# Allegro board BCK-E1_01v1.brd
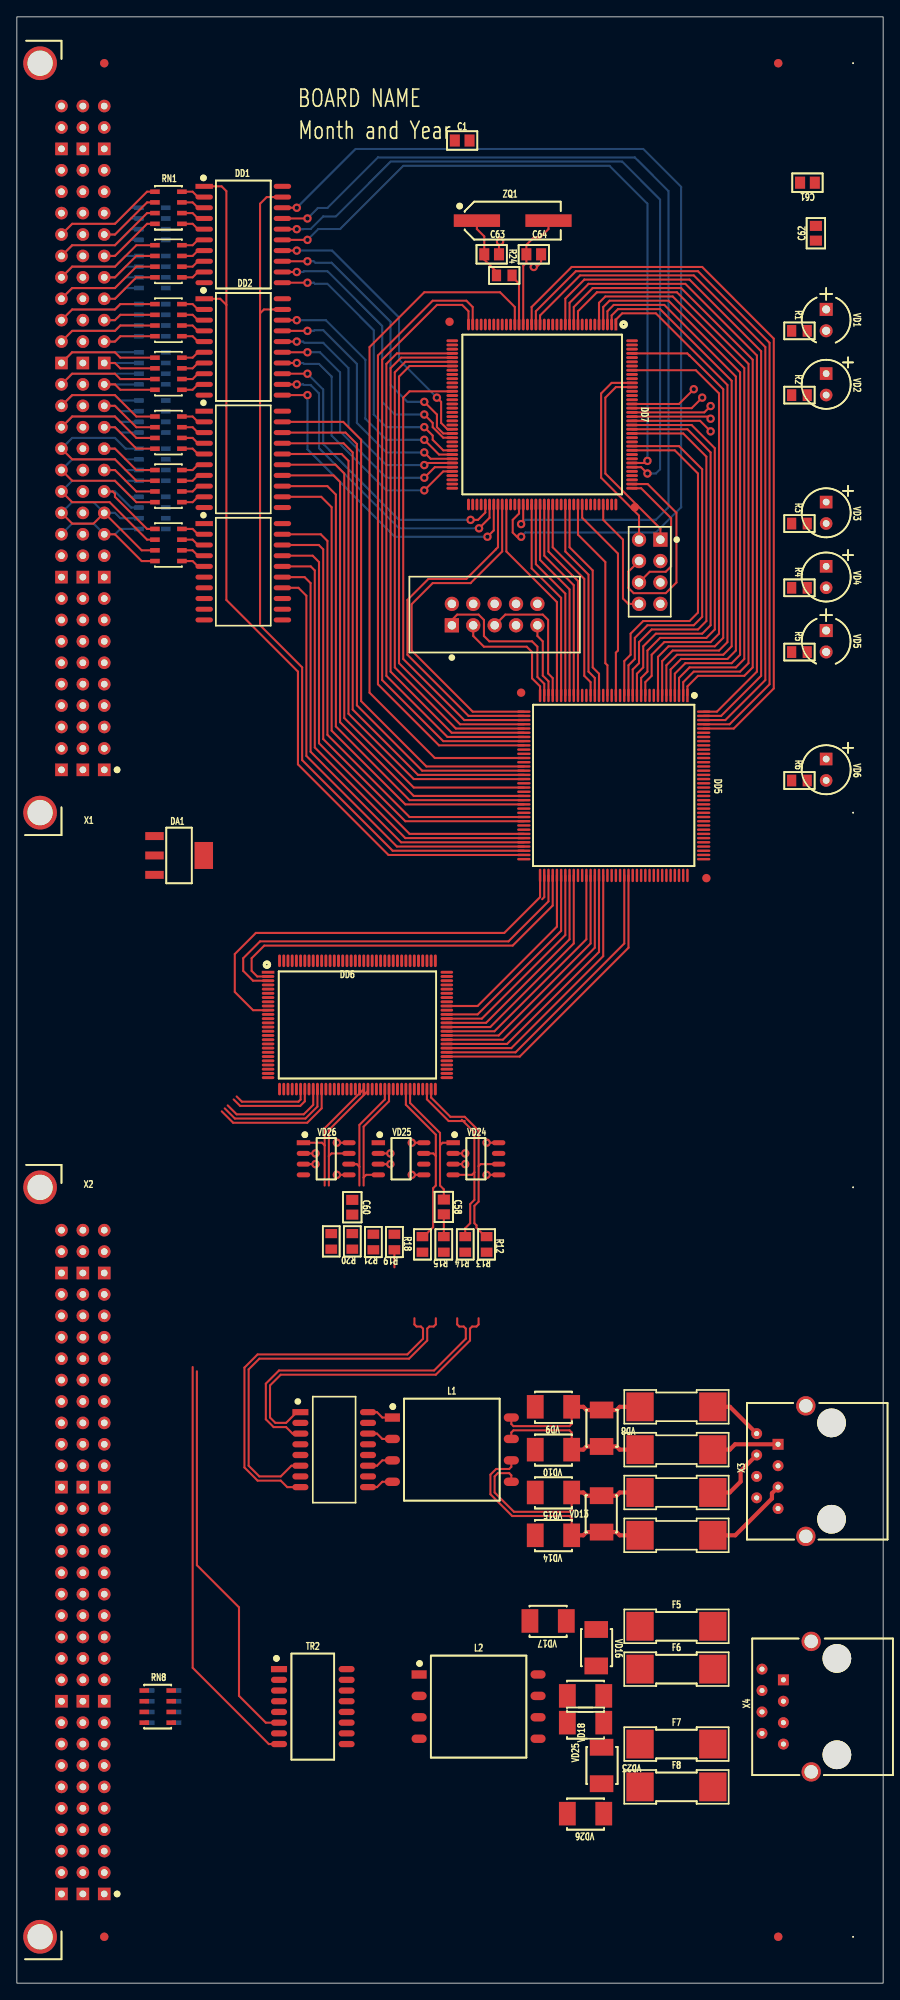
[diagram p0: board, top side]
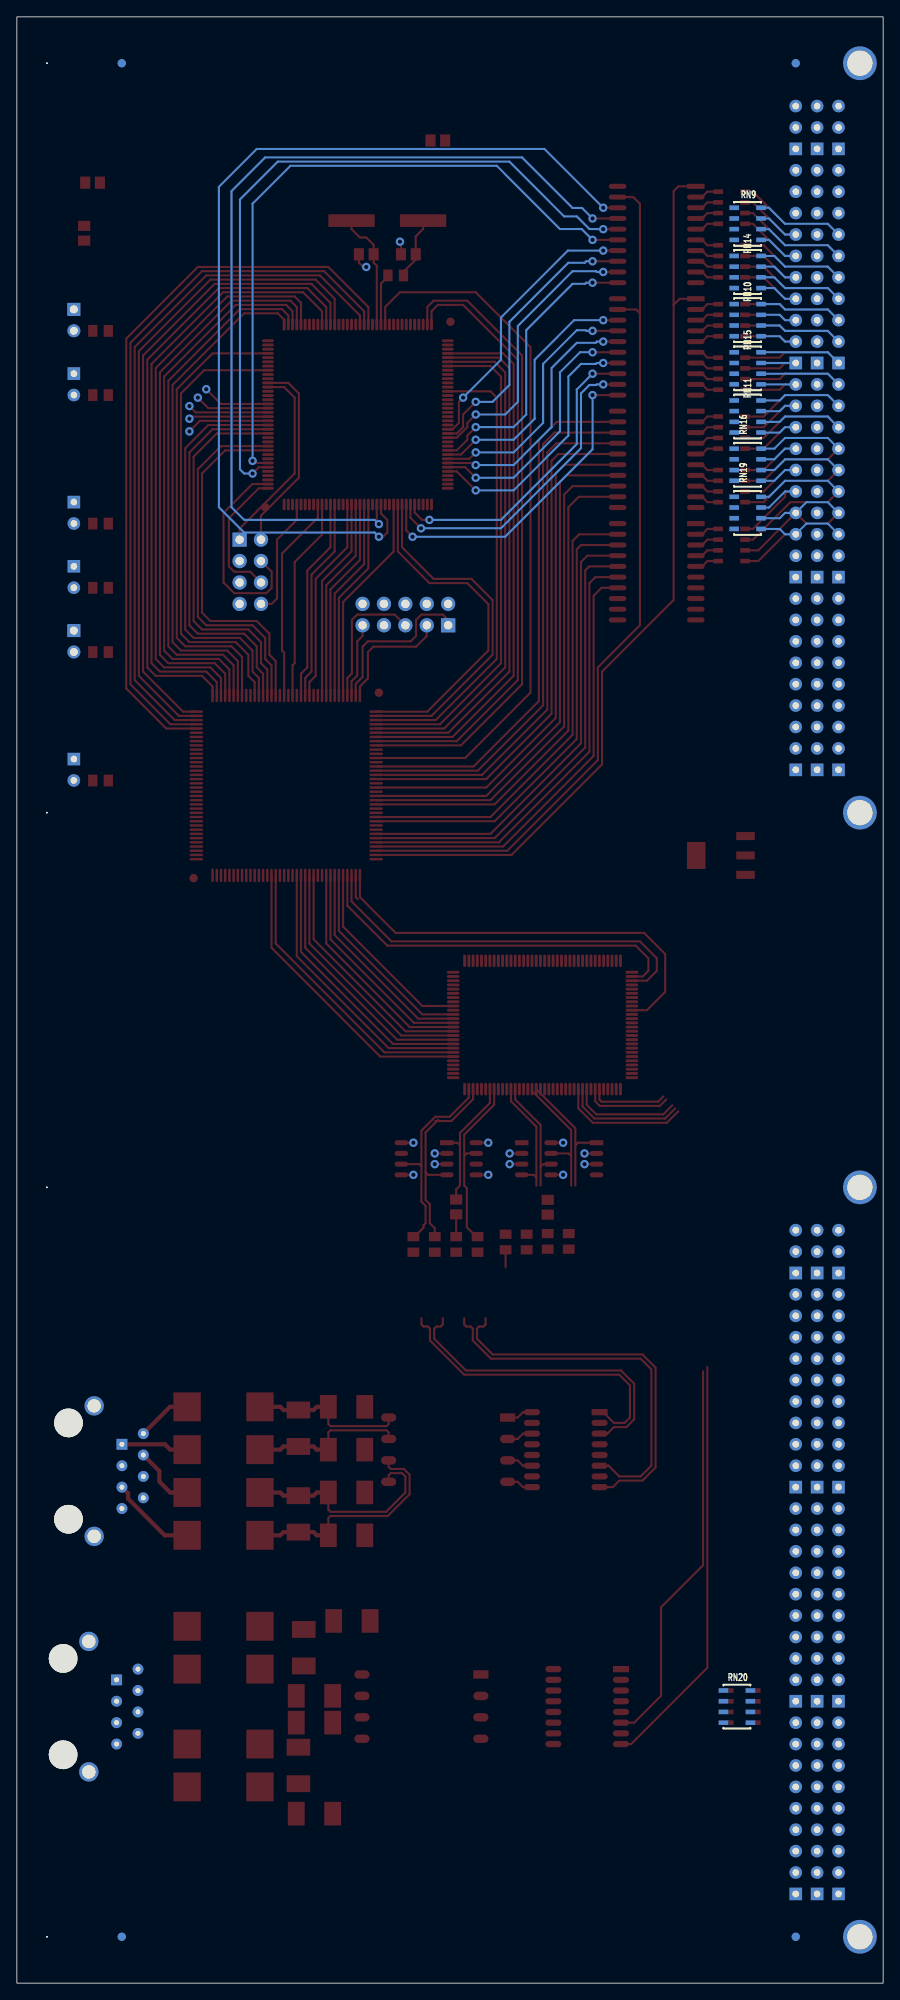
[diagram p1: board, bottom side, seen from below]

Outline 102.87 x 233.25 mm; copper layers: TOP, GND, PWR, BOTTOM. Coordinates in mm from the lower left corner of the outline.
Outline path: rectangle 0,0 102.87,233.25

## Design rules (mm)
net group 1RX1: nets 1RRING_DEF_BLCK1 1RTIP_DEF_BLCK1
net group 1RX2: nets 1RRING_DEF_BLCK2 1RTIP_DEF_BLCK2
net group 1TX1: nets 1TRING_DEF_BLCK1 1TTIP_DEF_BLCK1
net group 1TX2: nets 1TRING_DEF_BLCK2 1TTIP_DEF_BLCK2
net group 2RX1: nets 2RRING_DEF_BLCK1 2RTIP_DEF_BLCK1
net group 2RX2: nets 2RRING_DEF_BLCK2 2RTIP_DEF_BLCK2
net group 2TX1: nets 2TRING_DEF_BLCK1 2TTIP_DEF_BLCK1
net group 2TX2: nets 2TRING_DEF_BLCK2 2TTIP_DEF_BLCK2
net group E_TRLI1_RX: nets TRLI12 TRLI13
net group E_TRLI2_RX: nets TRLI22 TRLI23
net group E_TRLI2_TX: nets TRLI20 TRLI21
net group E_TRLI_TX: nets TRLI10 TRLI11
net group RX1: nets RRING1 RTIP1
net group RX2: nets RRING2 RTIP2
net group TX1: nets TRING1 TTIP1
net group TX2: nets TRING2 TTIP2

## Placement (name value [footprint] x y rotation side)
C1  1uF  [CAPC2012X130N]  52.88 218.58 0 top
C58  1uF  [CAPC2012X130N]  50.7 92.08 270 top
C60  1uF  [CAPC2012X130N]  39.83 92.04 270 top
C61  2.2uF  [CAPC2012X130N]  93.88 213.58 180 top
C62  2.2uF  [CAPC2012X130N]  94.88 207.58 90 top
C63  22pF  [CAPC2012X130N]  56.38 205.08 0 top
C64  22pF  [CAPC2012X130N]  61.38 205.08 0 top
DA1  ADP3339AKCZ-3.3  [SOT230P700X180-4N]  19.27 133.77 0 top
DD1  SN74ACT245DW  [SOIC127P1030X265-20N]  26.89 207.43 0 top
DD2  SN74ACT245DW  [SOIC127P1030X265-20N]  26.89 194.09 0 top
DD3  SN74LVC573ADW  [SOIC127P1030X265-20N]  26.89 180.76 0 top
DD4  SN74LVC573ADW  [SOIC127P1030X265-20N]  26.89 167.43 0 top
DD5  EPM1270T144C4N  [QFP50P2200X2200X160-144N]  70.88 142.08 270 top
DD6  82V2084PF  [QFP50P2200X2000X160-128N]  40.44 113.66 0 top
DD7  STM32F446ZET6  [LQFP50P2200X2200X160-144N]  62.38 186.08 270 top
F1  04611.25ER  [FUS10132X312N]  78.32 68.36 0 top
F2  04611.25ER  [FUS10132X312N]  78.32 63.28 0 top
F3  04611.25ER  [FUS10132X312N]  78.32 53.12 0 top
F4  04611.25ER  [FUS10132X312N]  78.32 58.2 0 top
F5  04611.25ER  [FUS10132X312N]  78.32 42.33 0 top
F6  04611.25ER  [FUS10132X312N]  78.32 37.25 0 top
F7  04611.25ER  [FUS10132X312N]  78.32 28.36 0 top
F8  04611.25ER  [FUS10132X312N]  78.32 23.28 0 top
L1  PE-65857NL  [SOIC254P1509X864-8N]  51.66 63.28 0 top
L2  PE-65857NL  [SOIC254P1509X864-8N]  54.83 32.8 0 top
NOREF  -  [unnamed]  99.3 227.75 0 top
NOREF#2  -  [unnamed]  99.3 138.85 0 top
NOREF#3  -  [unnamed#2]  10.38 5.5 0 top
NOREF#4  -  [unnamed#2]  90.41 5.5 0 top
NOREF#5  -  [unnamed#2]  90.41 227.75 0 top
NOREF#6  -  [unnamed#2]  10.38 227.75 0 top
NOREF#7  -  [unnamed]  99.3 94.4 0 top
NOREF#8  -  [unnamed]  99.3 5.5 0 top
NOREF#9  -  [unnamed#2]  90.41 227.75 180 bottom
NOREF#10  -  [unnamed#2]  10.38 5.5 180 bottom
NOREF#11  -  [unnamed#2]  10.38 227.75 180 bottom
NOREF#12  -  [unnamed#2]  90.41 5.5 180 bottom
R1  2.2k  [RESC2012X40N]  92.93 196 0 top
R2  1k  [RESC2012X40N]  92.93 188.38 0 top
R3  1k  [RESC2012X40N]  92.93 173.14 0 top
R4  1k  [RESC2012X40N]  92.93 165.52 0 top
R5  2.2k  [RESC2012X40N]  92.93 157.9 0 top
R6  1k  [RESC2012X40N]  92.93 142.66 0 top
R12  0  [RESC2012X40N]  55.78 87.63 270 top
R13  0  [RESC2012X40N]  53.24 87.63 270 top
R14  0  [RESC2012X40N]  50.7 87.63 270 top
R15  0  [RESC2012X40N]  48.16 87.63 270 top
R18  0  [RESC2012X40N]  44.83 87.91 270 top
R19  0  [RESC2012X40N]  42.33 87.91 270 top
R20  0  [RESC2012X40N]  37.33 87.99 270 top
R21  0  [RESC2012X40N]  39.83 87.99 270 top
R24  220  [RESC2012X40N]  57.88 202.58 0 top
RN1  100  [RESCAF127P320X508X60-8N]  18 210.61 0 top
RN2  100  [RESCAF127P320X508X60-8N]  18 204.26 0 top
RN3  100  [RESCAF127P320X508X60-8N]  18 197.27 0 top
RN4  100  [RESCAF127P320X508X60-8N]  18 190.92 0 top
RN5  100  [RESCAF127P320X508X60-8N]  18 183.94 0 top
RN6  100  [RESCAF127P320X508X60-8N]  18 177.59 0 top
RN7  100  [RESCAF127P320X508X60-8N]  18 170.6 0 top
RN8  100  [RESCAF127P320X508X60-8N]  16.73 32.8 0 top
RN9  10k  [RESCAF127P320X508X60-8N]  16.09 208.7 180 bottom
RN10  10k  [RESCAF127P320X508X60-8N]  16.09 197.27 180 bottom
RN11  10k  [RESCAF127P320X508X60-8N]  16.09 185.84 180 bottom
RN14  10k  [RESCAF127P320X508X60-8N]  16.09 202.99 180 bottom
RN15  10k  [RESCAF127P320X508X60-8N]  16.09 191.56 180 bottom
RN16  10k  [RESCAF127P320X508X60-8N]  16.09 180.12 180 bottom
RN19  10k  [RESCAF127P320X508X60-8N]  16.09 174.41 180 bottom
RN20  10k  [RESCAF127P320X508X60-8N]  17.37 32.8 180 bottom
TR1  T1094NL  [SOIC127P928X622-16N]  37.69 63.28 0 top
TR2  T1094NL  [SOIC127P928X622-16N]  35.15 32.8 0 top
VD1  FYL-5013PURD1C-60  [LEDRR254W50L580T580H870N]  96.1 197.28 270 top
VD2  L-53GD  [LEDRR254W47L590T590H500N]  96.1 189.66 270 top
VD3  L-53GD  [LEDRR254W47L590T590H500N]  96.1 174.42 270 top
VD4  L-53SYT  [LEDRR254W47L590T590H500N]  96.1 166.8 270 top
VD5  FYL-5013PURD1C-60  [LEDRR254W50L580T580H870N]  96.1 159.18 270 top
VD6  L-53GD  [LEDRR254W47L590T590H500N]  96.1 143.94 270 top
VD8  P0300SCMCLRP  [DIOM5336X265N_PAD200_300]  69.44 65.83 270 top
VD9  P1800SCMCLRP  [DIOM5336X265N_PAD200_300]  63.72 68.36 180 top
VD10  P1800SCMCLRP  [DIOM5336X265N_PAD200_300]  63.72 63.28 180 top
VD13  P0300SCMCLRP  [DIOM5336X265N_PAD200_300]  69.44 55.66 90 top
VD14  P1800SCMCLRP  [DIOM5336X265N_PAD200_300]  63.72 53.12 180 top
VD15  P1800SCMCLRP  [DIOM5336X265N_PAD200_300]  63.72 58.2 180 top
VD16  P0300SCMCLRP  [DIOM5336X265N_PAD200_300]  68.8 39.79 270 top
VD17  P1800SCMCLRP  [DIOM5336X265N_PAD200_300]  63.09 42.96 180 top
VD18  P1800SCMCLRP  [DIOM5336X265N_PAD200_300]  67.53 34.08 180 top
VD21  P0300SCMCLRP  [DIOM5336X265N_PAD200_300]  69.44 25.82 270 top
VD22  P1800SCMCLRP  [DIOM5336X265N_PAD200_300]  67.53 30.9 180 top
VD23  P1800SCMCLRP  [DIOM5336X265N_PAD200_300]  67.53 20.11 180 top
VD24  SRDA05-4BTG  [SOIC127P600X175-8N]  54.51 97.79 0 top
VD25  SRDA05-4BTG  [SOIC127P600X175-8N]  45.62 97.79 0 top
VD26  SRDA05-4BTG  [SOIC127P600X175-8N]  36.73 97.79 0 top
X1  UP  [AUK_DIN_3X32_96MR]  5.3 143.93 90 top
X2  DOWN  [AUK_DIN_3X32_96MR]  5.3 10.58 90 top
X3  1-5406299-1  [TE_1-5406299-1]  90.39 63.92 90 top
X4  1-5406299-1  [TE_1-5406299-1]  91.02 35.98 90 top
X7  IDC-10M  [SHDR0S254P5X2_2025X900X900]  51.66 161.08 0 top
X9  JTAG MCU  [PBD-08]  76.42 171.24 270 top
ZQ1  16.0MHz  [CRYSTAL1140X420N]  58.88 209.08 0 top

## Library data of the parts
C1 C58 C60-C64 = CAPACITOR
DA1 = LM1117
DD1 DD2 = 74LVC245APW_4
DD3 DD4 = SN74ACT573_2
DD5 = EPM1270T144C4N_30
DD6 = 82V2084PF_16
DD7 = STM32F446ZET6_28
F1-F8 = EFUSE
L1 L2 = PE-65857NL
R1-R6 = RESISTOR
R12-R15 R18-R21 R24 = R_0.125W
RN1-RN11 RN14-RN16 RN19 RN20 = Rx4_0.25W_united
TR1 TR2 = T1094NL_0
VD1-VD6 = LED
VD8-VD10 VD13-VD18 VD21-VD23 = THYRISTOR
VD24-VD26 = SRDA05_4
X1 = DIN96_ABC_23
X2 = DIN96_ABC_24
X3 X4 = TJ8P8C_SHIELD_1
X7 = CONN10_1
X9 = CONN8_5
ZQ1 = XTAL

## Footprints (pads in the part's own frame, mm; a bottom-side part is the same pattern mirrored in y, then rotated)
AUK_DIN_3X32_96MR
  rect 1.5x1.5 hole 0.8: A1(0,0) A10(22.86,0) A20(48.26,0) A30(73.66,0) B1(0,-2.54) B10(22.86,-2.54) B20(48.26,-2.54) B30(73.66,-2.54) C1(0,-5.08) C10(22.86,-5.08) C20(48.26,-5.08) C30(73.66,-5.08)
  round 1.5 hole 0.8: A2(2.54,0) A3(5.08,0) A4(7.62,0) A5(10.16,0) A6(12.7,0) A7(15.24,0) A8(17.78,0) A9(20.32,0) A11(25.4,0) A12(27.94,0) A13(30.48,0) A14(33.02,0) A15(35.56,0) A16(38.1,0) A17(40.64,0) A18(43.18,0) A19(45.72,0) A21(50.8,0) A22(53.34,0) A23(55.88,0) A24(58.42,0) A25(60.96,0) A26(63.5,0) A27(66.04,0) A28(68.58,0) A29(71.12,0) A31(76.2,0) A32(78.74,0) B2(2.54,-2.54) B3(5.08,-2.54) B4(7.62,-2.54) B5(10.16,-2.54) B6(12.7,-2.54) B7(15.24,-2.54) B8(17.78,-2.54) B9(20.32,-2.54) B11(25.4,-2.54) B12(27.94,-2.54) B13(30.48,-2.54) B14(33.02,-2.54) B15(35.56,-2.54) B16(38.1,-2.54) B17(40.64,-2.54) B18(43.18,-2.54) B19(45.72,-2.54) B21(50.8,-2.54) B22(53.34,-2.54) B23(55.88,-2.54) B24(58.42,-2.54) B25(60.96,-2.54) B26(63.5,-2.54) B27(66.04,-2.54) B28(68.58,-2.54) B29(71.12,-2.54) B31(76.2,-2.54) B32(78.74,-2.54) C2(2.54,-5.08) C3(5.08,-5.08) C4(7.62,-5.08) C5(10.16,-5.08) C6(12.7,-5.08) C7(15.24,-5.08) C8(17.78,-5.08) C9(20.32,-5.08) C11(25.4,-5.08) C12(27.94,-5.08) C13(30.48,-5.08) C14(33.02,-5.08) C15(35.56,-5.08) C16(38.1,-5.08) C17(40.64,-5.08) C18(43.18,-5.08) C19(45.72,-5.08) C21(50.8,-5.08) C22(53.34,-5.08) C23(55.88,-5.08) C24(58.42,-5.08) C25(60.96,-5.08) C26(63.5,-5.08) C27(66.04,-5.08) C28(68.58,-5.08) C29(71.12,-5.08) C31(76.2,-5.08) C32(78.74,-5.08)
  round 4 hole 3: SHIELD1(-5.08,2.54) SHIELD2(83.82,2.54)
CAPC2012X130N
  rect 1.2x1.45 smd: 1(-0.875,0) 2(0.875,0)
CRYSTAL1140X420N
  rect 5.5x1.5 smd: 1(-4.25,0) 2(4.25,0)
DIOM5336X265N_PAD200_300
  rect 2x2.8 smd: 1(-2.162,0) 2(2.162,0)
FUS10132X312N
  rect 3.25x3.43 smd: 1(-4.325,0) 2(4.325,0)
LEDRR254W47L590T590H500N
  rect 1.5x1.5 hole 0.8: 1(-1.27,0)
  round 1.5 hole 0.8: 2(1.27,0)
LEDRR254W50L580T580H870N
  rect 1.55x1.55 hole 0.95: 1(-1.27,0)
  round 1.55 hole 0.95: 2(1.27,0)
LQFP50P2200X2200X160-144N
  round 1 smd: (-11,-11) (11,11)
  rect 1.4x0.35 smd: 1(-10.675,8.75)
  oval 1.4x0.35 smd: 2(-10.675,8.25) 3(-10.675,7.75) 4(-10.675,7.25) 5(-10.675,6.75) 6(-10.675,6.25) 7(-10.675,5.75) 8(-10.675,5.25) 9(-10.675,4.75) 10(-10.675,4.25) 11(-10.675,3.75) 12(-10.675,3.25) 13(-10.675,2.75) 14(-10.675,2.25) 15(-10.675,1.75) 16(-10.675,1.25) 17(-10.675,0.75) 18(-10.675,0.25) 19(-10.675,-0.25) 20(-10.675,-0.75) 21(-10.675,-1.25) 22(-10.675,-1.75) 23(-10.675,-2.25) 24(-10.675,-2.75) 25(-10.675,-3.25) 26(-10.675,-3.75) 27(-10.675,-4.25) 28(-10.675,-4.75) 29(-10.675,-5.25) 30(-10.675,-5.75) 31(-10.675,-6.25) 32(-10.675,-6.75) 33(-10.675,-7.25) 34(-10.675,-7.75) 35(-10.675,-8.25) 36(-10.675,-8.75) 73(10.675,-8.75) 74(10.675,-8.25) 75(10.675,-7.75) 76(10.675,-7.25) 77(10.675,-6.75) 78(10.675,-6.25) 79(10.675,-5.75) 80(10.675,-5.25) 81(10.675,-4.75) 82(10.675,-4.25) 83(10.675,-3.75) 84(10.675,-3.25) 85(10.675,-2.75) 86(10.675,-2.25) 87(10.675,-1.75) 88(10.675,-1.25) 89(10.675,-0.75) 90(10.675,-0.25) 91(10.675,0.25) 92(10.675,0.75) 93(10.675,1.25) 94(10.675,1.75) 95(10.675,2.25) 96(10.675,2.75) 97(10.675,3.25) 98(10.675,3.75) 99(10.675,4.25) 100(10.675,4.75) 101(10.675,5.25) 102(10.675,5.75) 103(10.675,6.25) 104(10.675,6.75) 105(10.675,7.25) 106(10.675,7.75) 107(10.675,8.25) 108(10.675,8.75)
  oval 0.35x1.4 smd: 37(-8.75,-10.675) 38(-8.25,-10.675) 39(-7.75,-10.675) 40(-7.25,-10.675) 41(-6.75,-10.675) 42(-6.25,-10.675) 43(-5.75,-10.675) 44(-5.25,-10.675) 45(-4.75,-10.675) 46(-4.25,-10.675) 47(-3.75,-10.675) 48(-3.25,-10.675) 49(-2.75,-10.675) 50(-2.25,-10.675) 51(-1.75,-10.675) 52(-1.25,-10.675) 53(-0.75,-10.675) 54(-0.25,-10.675) 55(0.25,-10.675) 56(0.75,-10.675) 57(1.25,-10.675) 58(1.75,-10.675) 59(2.25,-10.675) 60(2.75,-10.675) 61(3.25,-10.675) 62(3.75,-10.675) 63(4.25,-10.675) 64(4.75,-10.675) 65(5.25,-10.675) 66(5.75,-10.675) 67(6.25,-10.675) 68(6.75,-10.675) 69(7.25,-10.675) 70(7.75,-10.675) 71(8.25,-10.675) 72(8.75,-10.675) 109(8.75,10.675) 110(8.25,10.675) 111(7.75,10.675) 112(7.25,10.675) 113(6.75,10.675) 114(6.25,10.675) 115(5.75,10.675) 116(5.25,10.675) 117(4.75,10.675) 118(4.25,10.675) 119(3.75,10.675) 120(3.25,10.675) 121(2.75,10.675) 122(2.25,10.675) 123(1.75,10.675) 124(1.25,10.675) 125(0.75,10.675) 126(0.25,10.675) 127(-0.25,10.675) 128(-0.75,10.675) 129(-1.25,10.675) 130(-1.75,10.675) 131(-2.25,10.675) 132(-2.75,10.675) 133(-3.25,10.675) 134(-3.75,10.675) 135(-4.25,10.675) 136(-4.75,10.675) 137(-5.25,10.675) 138(-5.75,10.675) 139(-6.25,10.675) 140(-6.75,10.675) 141(-7.25,10.675) 142(-7.75,10.675) 143(-8.25,10.675) 144(-8.75,10.675)
PBD-08
  rect 1.7x1.7 hole 1: 1(0,0)
  round 1.7 hole 1: 2(0,-2.54) 3(2.54,0) 4(2.54,-2.54) 5(5.08,0) 6(5.08,-2.54) 7(7.62,0) 8(7.62,-2.54)
QFP50P2200X2000X160-128N
  rect 1.5x0.35 smd: 1(-10.612,6.25)
  oval 1.5x0.35 smd: 2(-10.612,5.75) 3(-10.612,5.25) 4(-10.612,4.75) 5(-10.612,4.25) 6(-10.612,3.75) 7(-10.612,3.25) 8(-10.612,2.75) 9(-10.612,2.25) 10(-10.612,1.75) 11(-10.612,1.25) 12(-10.612,0.75) 13(-10.612,0.25) 14(-10.612,-0.25) 15(-10.612,-0.75) 16(-10.612,-1.25) 17(-10.612,-1.75) 18(-10.612,-2.25) 19(-10.612,-2.75) 20(-10.612,-3.25) 21(-10.612,-3.75) 22(-10.612,-4.25) 23(-10.612,-4.75) 24(-10.612,-5.25) 25(-10.612,-5.75) 26(-10.612,-6.25) 65(10.612,-6.25) 66(10.612,-5.75) 67(10.612,-5.25) 68(10.612,-4.75) 69(10.612,-4.25) 70(10.612,-3.75) 71(10.612,-3.25) 72(10.612,-2.75) 73(10.612,-2.25) 74(10.612,-1.75) 75(10.612,-1.25) 76(10.612,-0.75) 77(10.612,-0.25) 78(10.612,0.25) 79(10.612,0.75) 80(10.612,1.25) 81(10.612,1.75) 82(10.612,2.25) 83(10.612,2.75) 84(10.612,3.25) 85(10.612,3.75) 86(10.612,4.25) 87(10.612,4.75) 88(10.612,5.25) 89(10.612,5.75) 90(10.612,6.25)
  oval 0.35x1.5 smd: 27(-9.25,-7.612) 28(-8.75,-7.612) 29(-8.25,-7.612) 30(-7.75,-7.612) 31(-7.25,-7.612) 32(-6.75,-7.612) 33(-6.25,-7.612) 34(-5.75,-7.612) 35(-5.25,-7.612) 36(-4.75,-7.612) 37(-4.25,-7.612) 38(-3.75,-7.612) 39(-3.25,-7.612) 40(-2.75,-7.612) 41(-2.25,-7.612) 42(-1.75,-7.612) 43(-1.25,-7.612) 44(-0.75,-7.612) 45(-0.25,-7.612) 46(0.25,-7.612) 47(0.75,-7.612) 48(1.25,-7.612) 49(1.75,-7.612) 50(2.25,-7.612) 51(2.75,-7.612) 52(3.25,-7.612) 53(3.75,-7.612) 54(4.25,-7.612) 55(4.75,-7.612) 56(5.25,-7.612) 57(5.75,-7.612) 58(6.25,-7.612) 59(6.75,-7.612) 60(7.25,-7.612) 61(7.75,-7.612) 62(8.25,-7.612) 63(8.75,-7.612) 64(9.25,-7.612) 91(9.25,7.612) 92(8.75,7.612) 93(8.25,7.612) 94(7.75,7.612) 95(7.25,7.612) 96(6.75,7.612) 97(6.25,7.612) 98(5.75,7.612) 99(5.25,7.612) 100(4.75,7.612) 101(4.25,7.612) 102(3.75,7.612) 103(3.25,7.612) 104(2.75,7.612) 105(2.25,7.612) 106(1.75,7.612) 107(1.25,7.612) 108(0.75,7.612) 109(0.25,7.612) 110(-0.25,7.612) 111(-0.75,7.612) 112(-1.25,7.612) 113(-1.75,7.612) 114(-2.25,7.612) 115(-2.75,7.612) 116(-3.25,7.612) 117(-3.75,7.612) 118(-4.25,7.612) 119(-4.75,7.612) 120(-5.25,7.612) 121(-5.75,7.612) 122(-6.25,7.612) 123(-6.75,7.612) 124(-7.25,7.612) 125(-7.75,7.612) 126(-8.25,7.612) 127(-8.75,7.612) 128(-9.25,7.612)
QFP50P2200X2200X160-144N
  round 1 smd: (-11,-11) (11,11)
  rect 1.6x0.3 smd: 1(-10.675,8.75)
  oval 1.6x0.3 smd: 2(-10.675,8.25) 3(-10.675,7.75) 4(-10.675,7.25) 5(-10.675,6.75) 6(-10.675,6.25) 7(-10.675,5.75) 8(-10.675,5.25) 9(-10.675,4.75) 10(-10.675,4.25) 11(-10.675,3.75) 12(-10.675,3.25) 13(-10.675,2.75) 14(-10.675,2.25) 15(-10.675,1.75) 16(-10.675,1.25) 17(-10.675,0.75) 18(-10.675,0.25) 19(-10.675,-0.25) 20(-10.675,-0.75) 21(-10.675,-1.25) 22(-10.675,-1.75) 23(-10.675,-2.25) 24(-10.675,-2.75) 25(-10.675,-3.25) 26(-10.675,-3.75) 27(-10.675,-4.25) 28(-10.675,-4.75) 29(-10.675,-5.25) 30(-10.675,-5.75) 31(-10.675,-6.25) 32(-10.675,-6.75) 33(-10.675,-7.25) 34(-10.675,-7.75) 35(-10.675,-8.25) 36(-10.675,-8.75) 73(10.675,-8.75) 74(10.675,-8.25) 75(10.675,-7.75) 76(10.675,-7.25) 77(10.675,-6.75) 78(10.675,-6.25) 79(10.675,-5.75) 80(10.675,-5.25) 81(10.675,-4.75) 82(10.675,-4.25) 83(10.675,-3.75) 84(10.675,-3.25) 85(10.675,-2.75) 86(10.675,-2.25) 87(10.675,-1.75) 88(10.675,-1.25) 89(10.675,-0.75) 90(10.675,-0.25) 91(10.675,0.25) 92(10.675,0.75) 93(10.675,1.25) 94(10.675,1.75) 95(10.675,2.25) 96(10.675,2.75) 97(10.675,3.25) 98(10.675,3.75) 99(10.675,4.25) 100(10.675,4.75) 101(10.675,5.25) 102(10.675,5.75) 103(10.675,6.25) 104(10.675,6.75) 105(10.675,7.25) 106(10.675,7.75) 107(10.675,8.25) 108(10.675,8.75)
  oval 0.3x1.6 smd: 37(-8.75,-10.675) 38(-8.25,-10.675) 39(-7.75,-10.675) 40(-7.25,-10.675) 41(-6.75,-10.675) 42(-6.25,-10.675) 43(-5.75,-10.675) 44(-5.25,-10.675) 45(-4.75,-10.675) 46(-4.25,-10.675) 47(-3.75,-10.675) 48(-3.25,-10.675) 49(-2.75,-10.675) 50(-2.25,-10.675) 51(-1.75,-10.675) 52(-1.25,-10.675) 53(-0.75,-10.675) 54(-0.25,-10.675) 55(0.25,-10.675) 56(0.75,-10.675) 57(1.25,-10.675) 58(1.75,-10.675) 59(2.25,-10.675) 60(2.75,-10.675) 61(3.25,-10.675) 62(3.75,-10.675) 63(4.25,-10.675) 64(4.75,-10.675) 65(5.25,-10.675) 66(5.75,-10.675) 67(6.25,-10.675) 68(6.75,-10.675) 69(7.25,-10.675) 70(7.75,-10.675) 71(8.25,-10.675) 72(8.75,-10.675) 109(8.75,10.675) 110(8.25,10.675) 111(7.75,10.675) 112(7.25,10.675) 113(6.75,10.675) 114(6.25,10.675) 115(5.75,10.675) 116(5.25,10.675) 117(4.75,10.675) 118(4.25,10.675) 119(3.75,10.675) 120(3.25,10.675) 121(2.75,10.675) 122(2.25,10.675) 123(1.75,10.675) 124(1.25,10.675) 125(0.75,10.675) 126(0.25,10.675) 127(-0.25,10.675) 128(-0.75,10.675) 129(-1.25,10.675) 130(-1.75,10.675) 131(-2.25,10.675) 132(-2.75,10.675) 133(-3.25,10.675) 134(-3.75,10.675) 135(-4.25,10.675) 136(-4.75,10.675) 137(-5.25,10.675) 138(-5.75,10.675) 139(-6.25,10.675) 140(-6.75,10.675) 141(-7.25,10.675) 142(-7.75,10.675) 143(-8.25,10.675) 144(-8.75,10.675)
RESC2012X40N
  rect 1.1x1.4 smd: 1(-0.925,0) 2(0.925,0)
RESCAF127P320X508X60-8N
  rect 1.15x0.55 smd: 1(-1.6,1.905) 2(-1.6,0.635) 3(-1.6,-0.635) 4(-1.6,-1.905) 5(1.6,-1.905) 6(1.6,-0.635) 7(1.6,0.635) 8(1.6,1.905)
SHDR0S254P5X2_2025X900X900
  rect 1.7x1.7 hole 1: 1(0,0)
  round 1.7 hole 1: 2(0,2.54) 3(2.54,0) 4(2.54,2.54) 5(5.08,0) 6(5.08,2.54) 7(7.62,0) 8(7.62,2.54) 9(10.16,0) 10(10.16,2.54)
SOIC127P600X175-8N
  rect 1.6x0.6 smd: 1(-2.7,1.905)
  oval 1.6x0.6 smd: 2(-2.7,0.635) 3(-2.7,-0.635) 4(-2.7,-1.905) 5(2.7,-1.905) 6(2.7,-0.635) 7(2.7,0.635) 8(2.7,1.905)
SOIC127P928X622-16N
  rect 1.91x0.74 smd: 1(-4.015,4.445)
  oval 1.91x0.74 smd: 2(-4.015,3.175) 3(-4.015,1.905) 4(-4.015,0.635) 5(-4.015,-0.635) 6(-4.015,-1.905) 7(-4.015,-3.175) 8(-4.015,-4.445) 9(4.015,-4.445) 10(4.015,-3.175) 11(4.015,-1.905) 12(4.015,-0.635) 13(4.015,0.635) 14(4.015,1.905) 15(4.015,3.175) 16(4.015,4.445)
SOIC127P1030X265-20N
  rect 2.075x0.6 smd: 1(-4.645,5.715)
  oval 2.075x0.6 smd: 2(-4.645,4.445) 3(-4.645,3.175) 4(-4.645,1.905) 5(-4.645,0.635) 6(-4.645,-0.635) 7(-4.645,-1.905) 8(-4.645,-3.175) 9(-4.645,-4.445) 10(-4.645,-5.715) 11(4.645,-5.715) 12(4.645,-4.445) 13(4.645,-3.175) 14(4.645,-1.905) 15(4.645,-0.635) 16(4.645,0.635) 17(4.645,1.905) 18(4.645,3.175) 19(4.645,4.445) 20(4.645,5.715)
SOIC254P1509X864-8N
  rect 1.8x1 smd: 1(-7.062,3.81)
  oval 1.8x1 smd: 2(-7.062,1.27) 3(-7.062,-1.27) 4(-7.062,-3.81) 5(7.062,-3.81) 6(7.062,-1.27) 7(7.062,1.27) 8(7.062,3.81)
SOT230P700X180-4N
  rect 2.2x0.95 smd: 1(-2.925,2.3) 2(-2.925,0) 3(-2.925,-2.3)
  rect 2.2x3.2 smd: 4(2.925,0)
TE_1-5406299-1
  round 3.4 hole 3.4: (-8.89,-6.35) (2.54,-6.35)
  rect 1.3x1.3 hole 0.6: 1(0,0)
  round 1.3 hole 0.6: 2(1.27,2.54) 3(-2.54,0) 4(-1.27,2.54) 5(-5.08,0) 6(-3.81,2.54) 7(-7.62,0) 8(-6.35,2.54)
  round 2.3 hole 1.6: SHIELD1(-10.92,-3.3) SHIELD2(4.56,-3.3)
unnamed
  round 0.2 hole 2.7 unplated: (0,0)
unnamed#2
  round 1 smd: (0,0)

## Nets
GND: C1.2 C61.2 C62.2 C63.2 C64.2 DA1.1(GND) DD1.10(GND) DD2.10(GND) DD3.1(\\O\E) DD3.10(GND) DD4.1(\\O\E) DD4.10(GND) DD5.10(GNDIO#10) DD5.17(GNDINT#17) DD5.26(GNDIO#26) DD5.47(GNDIO#47) DD5.54(GNDINT#54) DD5.60(DEV_OE) DD5.65(GNDIO#65) DD5.83(GNDIO#83) DD5.89(GCLK2) DD5.91(GCLK3) DD5.92(GNDINT#92) DD5.99(GNDIO#99) DD5.115(GNDIO#115) DD5.128(GNDINT#128) DD5.135(GNDIO#135) DD6.7(IC_1) DD6.8(P/\S\) DD6.11(GNDD#11) DD6.12(GNDIO#12) DD6.23(GNDIO#23) DD6.39(IC_2) DD6.40(MCLKS) DD6.41(GNDA#41) DD6.49(GNDT3#49) DD6.50(GNDT3#50) DD6.51(GNDR3) DD6.59(GNDT4#59) DD6.60(GNDT4#60) DD6.61(GNDR4) DD6.69(GNDIO#69) DD6.83(GNDIO#83) DD6.84(GNDD#84) DD6.98(GNDIO#98) DD6.105(GNDT1#105) DD6.106(GNDT1#106) DD6.107(GNDR1) DD6.115(GNDT2#115) DD6.116(GNDT2#116) DD6.117(GNDR2) DD6.122(GNDA#122) DD6.123(\T\R\S\T\) DD7.16(VSS#16) DD7.31(VSSA) DD7.38(VSS#38) DD7.51(VSS#51) DD7.61(VSS#61) DD7.83(VSS#83) DD7.94(VSS#94) DD7.107(VSS#107) DD7.120(VSS#120) DD7.130(VSS#130) VD9.2(ANODE) VD10.2(ANODE) VD14.2(ANODE) VD15.2(ANODE) VD17.2(ANODE) VD18.2(ANODE) VD22.2(ANODE) VD23.2(ANODE) VD24.5(REF2) VD24.8(REF2_1) VD25.5(REF2) VD25.8(REF2_1) VD26.5(REF2) VD26.8(REF2_1) X1.A3(GND) X1.B3(GND#B3) X1.B4(GND#B4) X1.B5(GND#B5) X1.B6(GND#B6) X1.B7(GND#B7) X1.B8(GND#B8) X1.B9(GND#B9) X1.B10(GND#B10) X1.B11(GND#B11) X1.B12(GND#B12) X1.B13(GND#B13) X1.B14(GND#B14) X1.B15(GND#B15) X1.B16(GND#B16) X1.B17(GND#B17) X1.B18(GND#B18) X1.B19(GND#B19) X1.B20(GND#B20) X1.B21(GND#B21) X1.B22(GND#B22) X1.B23(GND#B23) X1.B24(GND#B24) X1.B25(GND#B25) X1.B26(GND#B26) X1.B27(GND#B27) X1.C3(GND) X2.A14(GND) X2.B1(GND#B1) X2.B2(GND#B2) X2.B3(GND#B3) X2.B4(GND#B4) X2.B6(GND#B6) X2.B7(GND#B7) X2.B8(GND#B8) X2.B9(GND#B9) X2.B10(GND#B10) X2.B11(GND#B11) X2.B13(GND#B13) X2.B14(GND#B14) X2.B15(GND#B15) X2.B16(GND#B16) X2.B17(GND#B17) X2.B18(GND#B18) X2.B19(GND#B19) X2.B20(GND#B20) X2.B21(GND#B21) X2.B22(GND#B22) X2.B23(GND#B23) X2.B24(GND#B24) X2.B25(GND#B25) X2.B26(GND#B26) X2.B27(GND#B27) X2.B28(GND#B28) X2.B29(GND#B29) X2.B30(GND#B30) X2.B31(GND#B31) X2.B32(GND#B32) X2.C14(GND) X7.2(GND#2) X7.10(GND#10) X9.5(GND)
1RRING_DEF_BLCK1: R13.2 TR1.3
1RRING_DEF_BLCK2: R19.2 TR2.3
1RTIP_DEF_BLCK1: R12.2 TR1.1
1RTIP_DEF_BLCK2: R18.2 TR2.1
1TRING_DEF_BLCK1: R15.2 TR1.8
1TRING_DEF_BLCK2: R21.2 TR2.8
1TTIP_DEF_BLCK1: R14.2 TR1.6
1TTIP_DEF_BLCK2: R20.2 TR2.6
2RRING_DEF_BLCK1: F2.1 L1.7 VD8.2(ANODE) VD10.1(CATHODE)
2RRING_DEF_BLCK2: F6.1 L2.7 VD16.2(ANODE) VD18.1(CATHODE)
2RTIP_DEF_BLCK1: F1.1 L1.8 VD8.1(CATHODE) VD9.1(CATHODE)
2RTIP_DEF_BLCK2: F5.1 L2.8 VD16.1(CATHODE) VD17.1(CATHODE)
2TRING_DEF_BLCK1: F4.1 L1.5 VD13.2(ANODE) VD15.1(CATHODE)
2TRING_DEF_BLCK2: F8.1 L2.5 VD21.2(ANODE) VD23.1(CATHODE)
2TTIP_DEF_BLCK1: F3.1 L1.6 VD13.1(CATHODE) VD14.1(CATHODE)
2TTIP_DEF_BLCK2: F7.1 L2.6 VD21.1(CATHODE) VD22.1(CATHODE)
#CS0: RN6.2 RN16.8 X1.A16(#CS0)
#CS1: RN6.1 RN16.7 X1.C16(#CS1)
#CS2: RN6.4 RN16.6 X1.A15(#CS2)
#CS3: RN6.3 RN16.5 X1.C15(#CS3)
#DEV_CLR: DD5.61(DEV_CLRN)
#OE: DD1.19(\\O\E) DD2.19(\\O\E) DD5.70(O\E\)
#RD: RN7.2 RN19.8 X1.A14(#RD)
#RES: RN7.4 RN19.5 X1.A12(#RES) X1.C12(#RES)
#TCS0: DD3.14(6Q) DD5.57(#CS0)
#TCS1: DD3.15(5Q) DD5.55(#CS1)
#TCS2: DD3.12(8Q) DD5.59(#CS2)
#TCS3: DD3.13(7Q) DD5.58(#CS3)
#TRD: DD4.18(2Q) DD5.63(#RD)
#TRES: DD4.16(4Q) DD5.67(#RES)
#TWR: DD4.19(1Q) DD5.62(#WR)
#WR: RN7.1 RN19.7 X1.C14(#WR)
+3.3B: DA1.2(VO#2) DA1.4(VO#4) DD3.11(LE) DD3.20(VCC) DD4.11(LE) DD4.20(VCC) DD6.9(VDDD#9) DD6.13(VDDIO#13) DD6.22(VDDIO#22) DD6.45(VDDT3#45) DD6.46(VDDT3#46) DD6.54(VDDR3) DD6.55(VDDT4#55) DD6.56(VDDT4#56) DD6.64(VDDR4) DD6.68(VDDIO#68) DD6.81(VDDIO#81) DD6.85(VDDD#85) DD6.99(VDDIO#99) DD6.101(VDDT1#101) DD6.102(VDDT1#102) DD6.110(VDDR1) DD6.111(VDDT2#111) DD6.112(VDDT2#112) DD6.120(VDDR2) DD7.6(VBAT) DD7.17(VDD#17) DD7.30(VDD#30) DD7.39(VDD#39) DD7.52(VDD#52) DD7.62(VDD#62) DD7.72(VDD#72) DD7.84(VDD#84) DD7.95(VDDUSB) DD7.108(VDD#108) DD7.121(VDD#121) DD7.131(VDD#131) DD7.143(PDR_ON) DD7.144(VDD#144) VD1.1(ANODE) VD2.1(ANODE) VD3.1(ANODE) VD4.1(ANODE) VD5.1(ANODE) VD6.1(ANODE) VD24.2(REF1) VD24.3(REF1_1) VD25.2(REF1) VD25.3(REF1_1) VD26.2(REF1) VD26.3(REF1_1) X9.3(3V3)
+3.3B_CPLD: DD5.9(VCCIO1#9) DD5.19(VCCINT#19) DD5.25(VCCIO1#25) DD5.46(VCCIO4#46) DD5.56(VCCINT#56) DD5.64(VCCIO4#64) DD5.82(VCCIO3#82) DD5.90(VCCINT#90) DD5.100(VCCIO3#100) DD5.116(VCCIO2#116) DD5.126(VCCINT#126) DD5.136(VCCIO2#136) X7.4(VDD)
+3.3BA_E1: DD6.44(VDDA#44) DD6.121(VDDA#121)
+3.3BA_MCU: DD7.32(VREF+) DD7.33(VDDA)
+5B: C1.1 DA1.3(VI) DD1.20(VCC) DD2.20(VCC) RN9.1 RN9.2 RN9.3 RN9.4 RN10.1 RN10.2 RN10.3 RN10.4 RN11.1 RN11.2 RN11.3 RN11.4 RN14.1 RN14.2 RN14.3 RN14.4 RN15.1 RN15.2 RN15.3 RN15.4 RN16.1 RN16.2 RN16.3 RN16.4 RN19.1 RN19.2 RN19.3 RN19.4 RN20.1 RN20.2 X1.A1(+5B#A1) X1.A2(+5B#A2) X1.B1(+5B#B1) X1.B2(+5B#B2) X1.C1(+5B#C1) X1.C2(+5B#C2)
A0: RN5.1 RN11.8 X1.A18(A0)
A1: RN5.2 RN11.7 X1.C18(A1)
A2: RN5.3 RN11.6 X1.A17(A2)
A3: RN5.4 RN11.5 X1.C17(A3)
ADR0: RN8.1 RN20.8 X2.A10(ADR0)
ADR1: RN8.2 RN20.7 X2.C10(ADR1)
BL: RN7.3 RN19.6 X1.A13(BL) X1.C13(BL)
BUSR3: X1.A8(BUSR3) X1.C8(BUSR3)
CI0: DD5.103(C\S\) DD6.32(\C\S\)
CI1: DD5.102(SCLK) DD6.33(SCLK)
CI2: DD5.104(SDI) DD6.35(SDI/R/\W\/\W\R\)
CI3: DD5.105(SDO) DD6.36(SDO)
CI4: DD5.107(I\N\T\) DD6.37(\I\N\T\)
CI5: DD5.98(R\S\T\) DD6.38(\R\S\T\)
CI6: DD5.106(THZ) DD6.4(THZ)
CI7: DD5.74(SCLKE) DD6.5(SCLKE)
D0: RN1.1 RN9.8 X1.A26(D0)
D1: RN1.2 RN9.7 X1.C26(D1)
D2: RN1.3 RN9.6 X1.A25(D2)
D3: RN1.4 RN9.5 X1.C25(D3)
D4: RN2.1 RN14.8 X1.A24(D4)
D5: RN2.2 RN14.7 X1.C24(D5)
D6: RN2.3 RN14.6 X1.A23(D6)
D7: RN2.4 RN14.5 X1.C23(D7)
D8: RN3.1 RN10.8 X1.A22(D8)
D9: RN3.2 RN10.7 X1.C22(D9)
D10: RN3.3 RN10.6 X1.A21(D10)
D11: RN3.4 RN10.5 X1.C21(D11)
D12: RN4.1 RN15.8 X1.A20(D12)
D13: RN4.2 RN15.7 X1.C20(D13)
D14: RN4.3 RN15.6 X1.A19(D14)
D15: RN4.4 RN15.5 X1.C19(D15)
DIR: DD1.1(DIR) DD2.1(DIR) DD5.71(DIR)
DOP0: DD5.31(DOP0) DD7.88(PG3)
DOP1: DD5.30(DOP1) DD7.89(PG4)
DOP2: DD5.29(DOP2) DD7.90(PG5)
DOP3: DD5.28(DOP3) DD7.91(PG6)
DOP4: DD5.27(DOP4) DD7.92(PG7)
DOP5: DD5.24(DOP5) DD7.93(PG8)
DOP6: DD5.23(DOP6) DD7.96(PC6)
DOP7: DD5.22(DOP7) DD7.97(PC7)
FMC_A0: DD5.2(FMC_A0) DD7.10(PF00/FMC_A0)
FMC_A1: DD5.1(FMC_A1) DD7.11(PF01/FMC_A1)
FMC_A2: DD5.144(FMC_A2) DD7.12(PF02/FMC_A2)
FMC_A3: DD5.143(FMC_A3) DD7.13(PF03/FMC_A3)
FMC_O0: DD5.13(FMC_NE1) DD7.123(PD07/FMC_NE1)
FMC_O1: DD5.11(FMC_NL) DD7.137(PB07/FMC_NL)
FMC_O2: DD5.16(FMC_NOE) DD7.118(PD04/FMC_NOE)
FMC_O3: DD5.14(FMC_NWAIT) DD7.122(PD06/FMC_NWAIT)
FMC_O4: DD5.15(FMC_NWE) DD7.119(PD05/FMC_NWE)
JTCK: DD7.109(PA14/JTCK) X9.6(JTCK)
JTDI: DD7.110(PA15/JTDI) X9.4(JTDI)
JTDO: DD7.133(PB03/JTDO) X9.1(JTDO)
JTMS: DD7.105(PA13/JTMS) X9.8(JTMS)
LED0: DD7.26(PC0) R1.1
LED1: DD7.27(PC1) R2.1
LED2: DD7.28(PC2) R3.1
LED3: DD7.87(PG2) R4.1
LED4: DD7.57(PG1) R5.1
LED5: DD7.56(PG0) R6.1
MCLK: DD5.73(MCLK) DD6.10(MCLK)
N407814_DEF_BLCK1: L1.1 TR1.16(P16)
N407814_DEF_BLCK2: L2.1 TR2.16(P16)
N407826_DEF_BLCK1: L1.2 TR1.14(P14)
N407826_DEF_BLCK2: L2.2 TR2.14(P14)
N407846_DEF_BLCK1: L1.4 TR1.9(P9)
N407846_DEF_BLCK2: L2.4 TR2.9(P9)
N586978_DEF_BLCK1: L1.3 TR1.11(P11)
N586978_DEF_BLCK2: L2.3 TR2.11(P11)
N601644_DEF_BLCK1: C58.2 R14.1
N601644_DEF_BLCK2: C60.2 R20.1
NJTRST: DD7.134(PB4/NJTRST) X9.2(NJTRST)
RRING1: F2.2 X3.1(RRING)
RRING2: F6.2 X4.1(RRING)
RTIP1: F1.2 X3.2(RTIP)
RTIP2: F5.2 X4.2(RTIP)
SAI1A0: DD5.5(FS1) DD7.3(PE04/SAI1_FS_A)
SAI1A1: DD5.7(MCLK1) DD7.1(PE02/SAI1_MCLK_A)
SAI1A2: DD5.4(SCK1) DD7.4(PE05/SAI1_SCK_A)
SAI1A3: DD5.3(SD1) DD7.5(PE06/SAI1_SD_A)
SAI1B0: DD5.140(FS2) DD7.21(PF09/SAI1_FS_B)
SAI1B1: DD5.142(MCLK2) DD7.19(PF07/SAI1_MCLK_B)
SAI1B2: DD5.141(SCK2) DD7.20(PF08/SA1_SCK_B)
SAI1B3: DD5.6(SD2) DD7.2(PE03/SAI1_SD_B)
SAI2A0: DD5.37(FS3) DD7.81(PD12/SAI2_FS_A)
SAI2A1: DD5.8(MCLK3) DD7.141(PE00/SAI2_MCLK_A)
SAI2A2: DD5.32(SCK3) DD7.82(PD13/SAI2_SCK_A)
SAI2A3: DD5.38(SD3) DD7.80(PD11/SAI2_SD_A)
SAI2B0: DD5.12(FS4) DD7.124(PG9/SAI2_FS_B)
SAI2B1: DD5.45(MCLK4) DD7.35(PA01/SAI2_MCLK_B)
SAI2B2: DD5.44(SCK4) DD7.36(PA02/SAI2_SCK_B)
SAI2B3: DD5.39(SD4) DD7.49(PF11/SAI2_SD_B)
SPI0: DD5.40(MOSI) DD7.43(PA07/SPI1_MOSI)
SPI1: DD5.41(MISO) DD7.42(PA06/SPI1_MISO)
SPI2: DD5.42(SCK) DD7.41(PA05/SPI1_SCK)
SPI3: DD5.43(NSS) DD7.40(PA04/SPI1_NSS)
TA0: DD3.19(1Q) DD5.50(A0)
TA1: DD3.18(2Q) DD5.51(A1)
TA2: DD3.17(3Q) DD5.52(A2)
TA3: DD3.16(4Q) DD5.53(A3)
TADR0: DD4.15(5Q) DD5.68(ADR0)
TADR1: DD4.14(6Q) DD5.69(ADR1)
TBL: DD4.17(3Q) DD5.66(BL)
TBUSR3: DD5.72(BUSR)
TCK: DD5.35(TCK) X7.1(TCK)
TD0: DD1.18(B1) DD7.85(PD14/FMC_D0)
TD1: DD1.17(B2) DD7.86(PD15/FMC_D1)
TD2: DD1.16(B3) DD7.114(PD00/FMC_D2)
TD3: DD1.15(B4) DD7.115(PD01/FMC_D3)
TD4: DD1.14(B5) DD7.58(PE07/FMC_D4)
TD5: DD1.13(B6) DD7.59(PE08/FMC_D5)
TD6: DD1.12(B7) DD7.60(PE09/FMC_D6)
TD7: DD1.11(B8) DD7.63(PE10/FMC_D7)
TD8: DD2.18(B1) DD7.64(PE11/FMC_D8)
TD9: DD2.17(B2) DD7.65(PE12/FMC_D9)
TD10: DD2.16(B3) DD7.66(PE13/FMC_D10)
TD11: DD2.15(B4) DD7.67(PE14/FMC_D11)
TD12: DD2.14(B5) DD7.68(PE15/FMC_D12)
TD13: DD2.13(B6) DD7.77(PD08/FMC_D13)
TD14: DD2.12(B7) DD7.78(PD09/FMC_D14)
TD15: DD2.11(B8) DD7.79(PD10/FMC_D15)
TDI: DD5.34(TDI) X7.9(TDI)
TDO: DD5.36(TDO) X7.3(TDO)
TMS: DD5.33(TMS) X7.5(TMS)
TP0: DD7.29(PC3)
TP1: DD7.104(PA12)
TP2: DD7.125(PG10)
TP3: DD7.126(PG11)
TP4: DD7.127(PG12)
TP5: DD7.128(PG13)
TP6: DD7.129(PG14)
TP7: DD7.132(PG15)
TRDDI10: DD5.75(LOS1) DD6.3(LOS4)
TRDDI11: DD5.88(RCLK1) DD6.72(RCLK4)
TRDDI12: DD5.93(RD/RDP1) DD6.71(RD4/RDP4)
TRDDI13: DD5.94(CV/RDN1) DD6.70(CV4/RDN4)
TRDDI14: DD5.85(TCLK1) DD6.75(TCLK4)
TRDDI15: DD5.86(TD/TDP1) DD6.74(TD4/TDP4)
TRDDI16: DD5.87(TDN1) DD6.73(TDN4)
TRDDI20: DD5.76(LOS2) DD6.2(LOS3)
TRDDI21: DD5.80(RCLK2) DD6.78(RCLK3)
TRDDI22: DD5.81(RD/RDP2) DD6.77(RD3/RDP3)
TRDDI23: DD5.84(CV/RDN2) DD6.76(CV3/RDN3)
TRDDI24: DD5.77(TCLK2) DD6.82(TCLK3)
TRDDI25: DD5.78(TD/TDP2) DD6.80(TD3/TDP3)
TRDDI26: DD5.79(TDN2) DD6.79(TDN3)
TRING1: F4.2 X3.4(TRING)
TRING2: F8.2 X4.4(TRING)
TRLI10: C58.1 DD6.58(TTIP4) VD24.1(IO1)
TRLI11: DD6.57(TRING4) R15.1 VD25.7(IO4)
TRLI12: DD6.63(RTIP4) R12.1 VD24.6(IO3)
TRLI13: DD6.62(RRING4) R13.1 VD24.4(IO2)
TRLI20: C60.1 DD6.48(TTIP3) VD26.7(IO4)
TRLI21: DD6.47(TRING3) R21.1 VD26.1(IO1)
TRLI22: DD6.53(RTIP3) R18.1 VD25.4(IO2)
TRLI23: DD6.52(RRING3) R19.1 VD26.6(IO3)
TTIP1: F3.2 X3.5(TTIP)
TTIP2: F7.2 X4.5(TTIP)
N303587: DD1.6(A5) RN2.8
N303599: DD1.7(A6) RN2.7
N303611: DD1.8(A7) RN2.6
N303626: DD1.9(A8) RN2.5
N310570: DD2.6(A5) RN4.8
N310582: DD2.7(A6) RN4.7
N310594: DD2.8(A7) RN4.6
N310606: DD2.9(A8) RN4.5
N317351: DD3.6(5D) RN6.8
N317366: DD3.7(6D) RN6.7
N317381: DD3.8(7D) RN6.6
N317913: DD3.9(8D) RN6.5
N319864: DD4.6(5D) RN8.8
N319876: DD4.7(6D) RN8.7
N322174: DD3.5(4D) RN5.5
N322189: DD3.4(3D) RN5.6
N322204: DD3.3(2D) RN5.7
N322218: DD3.2(1D) RN5.8
N322539: DD4.5(4D) RN7.5
N322554: DD4.4(3D) RN7.6
N322569: DD4.3(2D) RN7.7
N322584: DD4.2(1D) RN7.8
N326209: DD2.5(A4) RN3.5
N326224: DD2.4(A3) RN3.6
N326239: DD2.3(A2) RN3.7
N326254: DD2.2(A1) RN3.8
N326670: DD1.5(A4) RN1.5
N326685: DD1.4(A3) RN1.6
N326700: DD1.3(A2) RN1.7
N326715: DD1.2(A1) RN1.8
N419952: DD7.24(PH1/OSC_OUT) R24.2
N419956: C63.1 R24.1 ZQ1.1
N419974: C64.1 DD7.23(PH0/OSC_IN) ZQ1.2
N420535: C62.1 DD7.71(VCAP_1)
N420542: C61.1 DD7.106(VCAP_2)
N423650: DD7.138(BOOT0)
N444708: R1.2 VD1.2(CATHODE)
N444712: R2.2 VD2.2(CATHODE)
N444716: R3.2 VD3.2(CATHODE)
N444720: R4.2 VD4.2(CATHODE)
N444724: R5.2 VD5.2(CATHODE)
N444728: R6.2 VD6.2(CATHODE)
N526269: DD5.18(GCLK0) DD7.100(PA08/RCC_MCO_1)
N526273: DD5.20(GCLK1) DD7.99(PC09/RCC_MCO_2)
N570726: DD5.109(TP0)
N570730: DD5.110(TP1)
N570734: DD5.111(TP2)
N570738: DD5.112(TP3)
N570742: DD5.113(TP4)
N570746: DD5.114(TP5)
N570750: DD5.117(TP6)
N570754: DD5.118(TP7)
N577993: DD5.48(NRST) DD7.25(NRST)
N589916: DD6.43(REF)

Pads without a net: DD4 8 9 12 13; DD5 21 49 95 96 97 101 108 119 120 121 122 123 124 125 127 129 130 131 132 133 134 137 138 139; DD6 1 6 14 15 16 17 18 19 20 21 24 25 26 27 28 29 30 31 34 42 65 66 67 86 87 88 89 90 91 92 93 94 95 96 97 100 103 104 108 109 113 114 118 119 124 125 126 127 128; DD7 7 8 9 14 15 18 22 34 37 44 45 46 47 48 50 53 54 55 69 70 73 74 75 76 98 101 102 103 111 112 113 116 117 135 136 139 140 142; RN8 3 4 5 6; RN20 3 4 5 6; TR1 2 4 5 7 10 12 13 15; TR2 2 4 5 7 10 12 13 15; VD24 7; VD25 1 6; VD26 4; X1 A4 A5 A6 A7 A9 A10 A11 A27 A28 A29 A30 A31 A32 B28 B29 B30 B31 B32 C4 C5 C6 C7 C9 C10 C11 C27 C28 C29 C30 C31 C32 SHIELD1 SHIELD2; X2 A1 A2 A3 A4 A5 A6 A7 A8 A9 A11 A12 A13 A15 A16 A17 A18 A19 A20 A21 A22 A23 A24 A25 A26 A27 A28 A29 A30 A31 A32 B5 B12 C1 C2 C3 C4 C5 C6 C7 C8 C9 C11 C12 C13 C15 C16 C17 C18 C19 C20 C21 C22 C23 C24 C25 C26 C27 C28 C29 C30 C31 C32 SHIELD1 SHIELD2; X3 3 6 7 8 SHIELD1 SHIELD2; X4 3 6 7 8 SHIELD1 SHIELD2; X7 6 7 8; X9 7

## Via types
v1: diameter 1, hole 0.5, TOP to BOTTOM, 51 vias

## Routing (per net, layer and track width the routed paths; a pad name or vN(x,y) marks a point on that pad's centre or on a via; arc(x,y) is an arc through that point)
GND: length 12.2
  TOP w0.25: VD25.5 v1(46.89,95.89) ; C64.2 62.26,204.1 61.73,203.58 v1(61.38,203.58) ; VD24.8 v1(55.78,99.69) ; C63.2 57.26,206.46 v1(57.38,206.58) ; VD24.5 v1(55.78,95.89) ; VD26.8 v1(38,99.69) ; VD25.8 v1(46.89,99.69) ; VD26.5 v1(38,95.89)
1RRING_DEF_BLCK1: length 38.1
  TOP w0.25: TR1.3 32.74,65.19 31.97,65.96 30.49,65.96 29.56,66.89 29.56,71.11 31.13,72.67 49.54,72.67 53.31,76.44 53.31,77.64 53.06,77.89 52.54,77.89 52.29,78.14 52.29,78.87
1RTIP_DEF_BLCK1: length 37.5
  TOP w0.25: 54.83,78.87 54.83,78.14 54.58,77.89 54.06,77.89 53.81,77.64 53.81,76.23 49.75,72.17 31.34,72.17 30.06,70.91 30.06,67.09 30.7,66.46 31.97,66.46 33.24,67.73 TR1.1
1RTIP_DEF_BLCK2: length 2.1
  TOP w0.25: R18.2 44.83,84.91
1TRING_DEF_BLCK1: length 45.2
  TOP w0.25: TR1.8 32.11,58.84 31.34,59.61 28.59,59.61 27.02,61.17 27.02,73.02 28.59,74.58 46.37,74.58 48.23,76.44 48.23,77.64 47.98,77.89 47.46,77.89 47.21,78.14 47.21,78.87
1TRING_DEF_BLCK2: length 49.7
  TOP w0.25: 20.88,73.08 20.88,37.4 29.92,28.36 TR2.8
1TTIP_DEF_BLCK1: length 44.6
  TOP w0.25: 49.75,78.87 49.75,78.14 49.5,77.89 48.98,77.89 48.73,77.64 48.73,76.23 46.58,74.08 28.8,74.08 27.52,72.81 27.52,61.38 28.8,60.11 31.34,60.11 32.61,61.38 TR1.6
1TTIP_DEF_BLCK2: length 46.6
  TOP w0.25: 21.38,72.58 21.38,49.58 26.38,44.58 26.38,34.08 29.56,30.9 TR2.6
2RRING_DEF_BLCK1: length 18.7
  TOP w0.25: 65.94,63.35 VD10.1 65.88,65.33 65.63,65.58 58.97,65.58 58.72,65.33 L1.7
  TOP w0.5: F2.1 71.59,63.28 71.21,63.66 VD8.2 67.64,63.66 67.26,63.28 VD10.1
2RTIP_DEF_BLCK1: length 18.7
  TOP w0.25: L1.8 58.72,66.33 58.97,66.08 65.63,66.08 65.88,66.33 VD9.1 65.94,68.3
  TOP w0.5: VD9.1 67.26,68.36 67.64,67.99 VD8.1 71.21,67.99 71.59,68.36 F1.1
2TRING_DEF_BLCK1: length 25.6
  TOP w0.25: VD15.1 65.88,56.16 65.63,55.91 59.03,55.91 56.73,58.2 56.73,60.11 57.12,60.49 58.47,60.49 58.72,60.24 58.72,59.48
  TOP w0.5: VD15.1 67.26,58.2 67.64,57.83 VD13.2 71.21,57.83 71.59,58.2 F4.1
2TTIP_DEF_BLCK1: length 27.2
  TOP w0.25: VD14.1 65.88,55.16 65.63,55.41 58.82,55.41 56.23,58 56.23,60.32 56.91,60.99 58.47,60.99 58.72,61.24 58.72,62.02
  TOP w0.5: F3.1 71.59,53.12 71.21,53.5 VD13.1 67.64,53.5 67.26,53.12 VD14.1
#CS0: length 22.9
  TOP w0.25: X1.A16 6.57,180.76 11.65,180.76 14.19,178.22 RN6.2
  BOTTOM w0.25: X1.A16 6.57,183.3 11.65,183.3 12.92,182.03 RN16.8
#CS1: length 11.7
  TOP w0.25: X1.C16 11.65,182.03 14.19,179.49 RN6.1
  BOTTOM w0.25: X1.C16 11.65,182.03 12.92,180.76 RN16.7
#CS2: length 22.9
  TOP w0.25: X1.A15 6.57,178.22 11.65,178.22 14.19,175.68 RN6.4
  BOTTOM w0.25: RN16.6 12.92,179.49 11.65,180.76 6.57,180.76 X1.A15
#CS3: length 11.7
  TOP w0.25: X1.C15 11.65,179.49 14.19,176.95 RN6.3
  BOTTOM w0.25: X1.C15 11.65,179.49 12.92,178.22 RN16.5
#OE: length 104.7
  TOP w0.25: DD5.70 44.63,134.33 33.88,145.08 33.88,156.08 28.88,161.08 28.88,198.08 ; 28.88,198.08 28.88,211.08 29.68,211.88 DD1.19 ; 28.88,198.08 29.34,198.54 DD2.19
#RD: length 24
  TOP w0.25: X1.A14 6.57,175.68 11.02,175.68 15.46,171.24 RN7.2
  BOTTOM w0.25: X1.A14 6.57,178.22 11.65,178.22 13.55,176.32 RN19.8
#RES: length 17.8
  TOP w0.25: X1.C12 11.65,171.87 14.83,168.7 RN7.4
  BOTTOM w0.25: X1.A12 6.57,173.14 9.11,173.14 X1.C12 11.65,171.87 12.29,172.51 RN19.5
#TCS0: length 61.1
  TOP w0.25: DD5.57 47.13,140.83 38.38,149.58 38.38,178.08 37.61,178.86 DD3.14
#TCS1: length 61.5
  TOP w0.25: 31.54,180.12 37.84,180.12 38.88,179.08 38.88,150.08 47.13,141.83 DD5.55
#TCS2: length 59.3
  TOP w0.25: DD3.12 36.15,176.32 37.38,175.08 37.38,148.58 46.13,139.83 DD5.59
#TCS3: length 60.2
  TOP w0.25: DD5.58 46.63,140.33 37.88,149.08 37.88,176.58 36.88,177.59 DD3.13
#TRD: length 55.4
  TOP w0.25: DD5.63 46.13,137.83 36.38,147.58 36.38,170.08 35.86,170.6 DD4.18
#TRES: length 54.3
  TOP w0.25: DD4.16 34.9,168.06 35.38,167.58 35.38,146.58 46.13,135.83 DD5.67
#TWR: length 56
  TOP w0.25: DD5.62 46.63,138.33 36.88,148.08 36.88,171.08 36.09,171.87 DD4.19
#WR: length 13
  TOP w0.25: X1.C14 11.38,176.95 11.65,176.68 11.65,176.32 15.46,172.51 RN7.1
  BOTTOM w0.25: X1.C14 11.65,176.95 13.55,175.05 RN19.7
+3.3B: length 8.6
  TOP w0.25: VD24.2 v1(53.24,98.42) ; 42.92,97.16 v1(44.35,97.16) ; 51.81,97.16 v1(53.24,97.16) ; VD26.2 v1(35.46,98.42) ; VD25.2 v1(44.35,98.42) ; 34.03,97.16 v1(35.46,97.16)
A0: length 22.7
  TOP w0.25: RN5.1 14.19,185.84 11.65,188.38 6.57,188.38 X1.A18
  BOTTOM w0.25: RN11.8 12.29,187.75 11.65,188.38 6.57,188.38 X1.A18
A1: length 11.5
  TOP w0.25: RN5.2 14.19,184.57 11.65,187.11 X1.C18
  BOTTOM w0.25: X1.C18 11.65,187.11 12.29,186.48 14.5,186.48
A2: length 22.7
  TOP w0.25: RN5.3 14.19,183.3 11.65,185.84 6.57,185.84 X1.A17
  BOTTOM w0.25: X1.A17 6.57,185.84 11.65,185.84 12.29,185.21 RN11.6
A3: length 11.5
  TOP w0.25: RN5.4 14.19,182.03 11.65,184.57 X1.C17
  BOTTOM w0.25: X1.C17 11.65,184.57 12.29,183.94 RN11.5
BL: length 24.5
  TOP w0.25: 16.4,169.97 14.83,169.97 X1.C13 9.11,173.14 6.57,173.14 X1.A13
  BOTTOM w0.25: X1.A13 6.57,175.68 9.11,175.68 X1.C13 11.65,174.41 12.29,173.78 RN19.6
CI0: length 9.2
  TOP w0.25: 26.1,105.18 26.72,104.56 33.44,104.56 33.69,104.81 DD6.32
CI1: length 10.4
  TOP w0.25: 25.75,104.83 26.51,104.06 33.65,104.06 34.19,104.61 DD6.33
CI2: length 12.9
  TOP w0.25: DD6.35 35.19,104.19 34.07,103.06 26.1,103.06 25.04,104.12
CI3: length 14.2
  TOP w0.25: 24.69,103.77 25.89,102.56 34.27,102.56 35.69,103.98 DD6.36
CI4: length 15.4
  TOP w0.25: 24.33,103.41 25.69,102.06 34.48,102.06 36.19,103.78 DD6.37
CI7: length 2.9
  TOP w0.25: 62.38,128.58 62.63,128.83 DD5.74
D0: length 23.7
  TOP w0.25: X1.A26 6.57,208.7 11.65,208.7 15.46,212.51 RN1.1
  BOTTOM w0.25: RN9.8 13.55,210.61 11.65,208.7 6.57,208.7 X1.A26
D1: length 12.5
  TOP w0.25: RN1.2 15.46,211.24 11.65,207.43 X1.C26
  BOTTOM w0.25: X1.C26 11.65,207.43 13.55,209.34 RN9.7
D2: length 23.7
  TOP w0.25: RN1.3 15.46,209.97 11.65,206.16 6.57,206.16 X1.A25
  BOTTOM w0.25: RN9.6 13.55,208.07 11.65,206.16 6.57,206.16 X1.A25
D3: length 12.5
  TOP w0.25: RN1.4 15.46,208.7 11.65,204.89 X1.C25
  BOTTOM w0.25: X1.C25 11.65,204.89 13.55,206.8 RN9.5
D4: length 22.9
  TOP w0.25: RN2.1 14.19,206.16 11.65,203.62 6.57,203.62 X1.A24
  BOTTOM w0.25: RN14.8 12.92,204.89 11.65,203.62 6.57,203.62 X1.A24
D5: length 11.7
  TOP w0.25: X1.C24 11.65,202.35 14.19,204.89 RN2.2
  BOTTOM w0.25: RN14.7 12.92,203.62 11.65,202.35 X1.C24
D6: length 22.9
  TOP w0.25: RN2.3 14.19,203.62 11.65,201.08 6.57,201.08 X1.A23
  BOTTOM w0.25: RN14.6 12.92,202.35 11.65,201.08 6.57,201.08 X1.A23
D7: length 11.7
  TOP w0.25: RN2.4 14.19,202.35 11.65,199.81 X1.C23
  BOTTOM w0.25: X1.C23 11.65,199.81 12.92,201.08 RN14.5
D8: length 21.9
  TOP w0.25: RN3.1 12.29,199.18 11.65,198.54 6.57,198.54 X1.A22
  BOTTOM w0.25: X1.A22 6.57,198.54 11.65,198.54 12.29,199.18 RN10.8
D9: length 10.7
  TOP w0.25: RN3.2 12.29,197.91 11.65,197.27 X1.C22
  BOTTOM w0.25: X1.C22 11.65,197.27 12.29,197.91 RN10.7
D10: length 21.9
  TOP w0.25: X1.A21 6.57,196 11.65,196 12.29,196.64 RN3.3
  BOTTOM w0.25: RN10.6 12.29,196.64 11.65,196 6.57,196 X1.A21
D11: length 10.7
  TOP w0.25: RN3.4 12.29,195.37 11.65,194.73 X1.C21
  BOTTOM w0.25: RN10.5 12.29,195.37 11.65,194.73 X1.C21
D12: length 21.6
  TOP w0.25: X1.A20 6.57,193.46 11.65,193.46 12.29,192.83 RN4.1
  BOTTOM w0.25: RN15.8 6.57,193.46 X1.A20
D13: length 10.4
  TOP w0.25: X1.C20 11.65,192.19 12.29,191.56 RN4.2
  BOTTOM w0.25: X1.C20 RN15.7
D14: length 21.6
  TOP w0.25: RN4.3 12.29,190.29 11.65,190.92 6.57,190.92 X1.A19
  BOTTOM w0.25: RN15.6 6.57,190.92 X1.A19
D15: length 10.4
  TOP w0.25: RN4.4 12.29,189.02 11.65,189.65 X1.C19
  BOTTOM w0.25: RN15.5 X1.C19
DIR: length 108.6
  TOP w0.25: 24.88,199.08 24.15,199.81 22.25,199.81 ; 24.88,199.08 24.88,164.08 33.38,155.58 33.38,144.58 44.13,133.83 DD5.71 ; 24.88,199.08 24.88,212.58 24.32,213.15 22.25,213.15
DOP0: length 24.1
  TOP w0.25: DD7.88 61.13,167.83 64.63,164.33 DD5.31
DOP1: length 24.1
  TOP w0.25: DD5.30 65.13,164.83 61.63,168.33 DD7.89
DOP2: length 24.1
  TOP w0.25: DD5.29 65.63,165.33 62.13,168.83 DD7.90
DOP3: length 24.1
  TOP w0.25: DD7.91 62.63,169.33 66.13,165.83 DD5.28
DOP4: length 24.1
  TOP w0.25: DD7.92 63.13,169.83 66.63,166.33 DD5.27
DOP5: length 24.5
  TOP w0.25: DD5.24 68.13,154.33 67.38,155.08 67.38,166.58 63.63,170.33 DD7.93
DOP6: length 24.1
  TOP w0.25: DD7.96 65.13,169.83 67.88,167.08 67.88,155.58 68.63,154.83 DD5.23
DOP7: length 24.1
  TOP w0.25: DD5.22 69.13,155.33 68.38,156.08 68.38,167.58 65.63,170.33 DD7.97
FMC_A0: length 72
  TOP w0.25: DD5.2 79.13,154.33 80.38,155.58 85.88,155.58 86.88,156.58 86.88,192.08 78.38,200.58 68.88,200.58 68.88,200.58 66.63,198.33 DD7.10
FMC_A1: length 74
  TOP w0.25: DD7.11 66.13,198.83 68.38,201.08 68.38,201.08 78.88,201.08 87.38,192.58 87.38,156.08 86.38,155.08 80.88,155.08 79.63,153.83 DD5.1
FMC_A2: length 75.1
  TOP w0.25: DD5.144 83.13,150.83 87.88,155.58 87.88,193.08 79.38,201.58 67.88,201.58 67.88,201.57 65.63,199.32 DD7.12
FMC_A3: length 78.1
  TOP w0.25: DD7.13 65.13,199.83 67.38,202.08 67.38,202.08 79.88,202.08 88.38,193.58 88.38,155.08 83.63,150.33 DD5.143
FMC_O0: length 46.1
  TOP w0.25: DD5.13 73.63,155.33 74.38,156.08 74.38,158.58 75.88,160.08 81.38,160.08 82.38,161.08 82.38,181.58 79.63,184.33 DD7.123
FMC_O1: length 54.1
  TOP w0.25: DD7.137 80.63,191.33 83.38,188.58 83.38,160.08 82.38,159.08 76.88,159.08 75.38,157.58 75.38,155.08 74.63,154.33 DD5.11
FMC_O2: length 42.1
  TOP w0.25: DD7.118 78.13,181.83 80.88,179.08 80.88,162.58 79.88,161.58 74.38,161.58 72.88,160.08 72.88,157.58 72.13,156.83 DD5.16
FMC_O3: length 45.1
  TOP w0.25: DD5.14 73.13,155.83 73.88,156.58 73.88,159.08 75.38,160.58 80.88,160.58 81.88,161.58 81.88,181.08 79.13,183.83 DD7.122
FMC_O4: length 43.1
  TOP w0.25: DD7.119 78.63,182.33 81.38,179.58 81.38,162.08 80.38,161.08 74.88,161.08 73.38,159.58 73.38,157.08 72.63,156.33 DD5.15
JTCK: length 16.4
  TOP w0.25: DD7.109 74.14,177.33 77.69,173.78 77.69,168.06 77.05,167.43 75.15,167.43 X9.6
JTDI: length 25.1
  TOP w0.25: DD7.110 74.91,177.83 78.32,174.41 78.32,166.16 77.05,164.89 73.25,164.89 72.61,165.52 72.61,167.43 X9.4
JTDO: length 23.2
  TOP w0.25: DD7.133 71.13,189.33 69.88,188.08 69.88,179.08 76.42,172.54 X9.1
JTMS: length 14.3
  TOP w0.25: X9.8 72.61,163.62 71.97,164.25 71.97,171.24 69.63,173.58 DD7.105
MCLK: length 51
  TOP w0.25: DD6.10 28.05,115.41 25.88,117.58 25.88,122.08 28.38,124.58 57.88,124.58 62.13,128.83 DD5.73
N407814_DEF_BLCK1: length 3.2
  TOP w0.25: L1.1 43.4,67.09 42.77,67.73 TR1.16
N407826_DEF_BLCK1: length 3.2
  TOP w0.25: L1.2 43.4,64.56 42.77,65.19 TR1.14
N407846_DEF_BLCK1: length 3.2
  TOP w0.25: 44.59,59.48 43.4,59.48 42.77,58.84 TR1.9
N586978_DEF_BLCK1: length 3.2
  TOP w0.25: 44.59,62.02 43.4,62.02 42.77,61.38 TR1.11
N601644_DEF_BLCK1: length 2.6
  TOP w0.25: R14.1 C58.2
NJTRST: length 23.4
  TOP w0.25: DD7.134 70.63,189.83 69.38,188.58 69.38,178.58 73.88,174.08 X9.2
RRING1: length 8
  TOP w0.5: X3.1 85.29,63.92 84.65,63.28 F2.2
RTIP1: length 6.6
  TOP w0.5: X3.2 84.67,68.36 F1.2 82.65,68.28
SAI1A0: length 64.9
  TOP w0.25: DD5.5 77.63,155.83 78.88,157.08 84.38,157.08 85.38,158.08 85.38,190.58 76.88,199.08 70.88,199.08 70.13,198.33 DD7.3
SAI1A1: length 60.9
  TOP w0.25: DD7.1 71.13,197.33 71.88,198.08 75.88,198.08 84.38,189.58 84.38,159.08 83.38,158.08 77.88,158.08 76.63,156.83 DD5.7
SAI1A2: length 66.9
  TOP w0.25: DD7.4 69.63,198.83 70.38,199.58 77.38,199.58 85.88,191.08 85.88,157.58 84.88,156.58 79.38,156.58 78.13,155.33 DD5.4
SAI1A3: length 68.9
  TOP w0.25: DD5.3 78.63,154.83 79.88,156.08 85.38,156.08 86.38,157.08 86.38,191.58 77.88,200.08 69.88,200.08 69.13,199.33 DD7.5
SAI1B0: length 88.1
  TOP w0.25: DD7.21 61.13,198.84 61.14,198.84 65.88,203.58 81.38,203.58 89.88,195.08 89.88,153.58 85.13,148.83 DD5.140
SAI1B1: length 82.1
  TOP w0.25: DD7.19 62.13,197.83 66.88,202.58 80.38,202.58 88.88,194.08 88.88,154.58 84.13,149.83 DD5.142
SAI1B2: length 85.1
  TOP w0.25: DD5.141 84.63,149.33 89.38,154.08 89.38,194.58 80.88,203.08 66.38,203.08 61.63,198.33 DD7.20
SAI1B3: length 62.9
  TOP w0.25: DD5.6 77.13,156.33 78.38,157.58 83.88,157.58 84.88,158.58 84.88,190.08 76.38,198.58 71.38,198.58 70.63,197.83 DD7.2
SAI2A0: length 40.7
  TOP w0.25: DD5.37 54.13,150.83 46.88,158.08 46.88,163.58 49.38,166.08 53.88,166.08 53.88,166.09 57.63,169.84 DD7.81
SAI2A1: length 55.3
  TOP w0.25: DD7.141 79.61,193.33 79.86,193.08 79.88,193.08 83.88,189.08 83.88,159.58 82.88,158.58 77.38,158.58 76.13,157.33 DD5.8
SAI2A2: length 25.1
  TOP w0.25: DD5.32 64.13,163.83 58.13,169.83 DD7.82
SAI2A3: length 41.7
  TOP w0.25: DD5.38 53.63,150.33 46.38,157.58 46.38,164.08 48.88,166.58 53.38,166.58 56.88,170.08 56.88,170.09 57.13,170.34 DD7.80
SAI2B0: length 47.1
  TOP w0.25: DD5.12 74.13,154.83 74.88,155.58 74.88,158.08 76.38,159.58 81.88,159.58 82.88,160.58 82.88,182.08 80.13,184.83 DD7.124
SAI2B1: length 75.7
  TOP w0.25: DD7.35 54.13,198.83 53.38,199.58 49.38,199.58 42.88,193.08 42.88,154.08 50.13,146.83 DD5.45
SAI2B2: length 72.7
  TOP w0.25: DD5.44 50.63,147.33 43.38,154.58 43.38,192.58 49.88,199.08 52.88,199.08 53.63,198.33 DD7.36
SAI2B3: length 54.5
  TOP w0.25: DD5.39 53.13,149.83 45.88,157.08 45.88,188.08 46.63,188.83 DD7.49
SPI0: length 58.7
  TOP w0.25: DD7.43 46.63,191.83 45.38,190.58 45.38,156.58 52.63,149.33 DD5.40
SPI1: length 60.7
  TOP w0.25: DD7.42 46.13,192.33 44.88,191.08 44.88,156.08 52.13,148.83 DD5.41
SPI2: length 62.7
  TOP w0.25: DD7.41 45.63,192.83 44.38,191.58 44.38,155.58 51.63,148.33 DD5.42
SPI3: length 64.7
  TOP w0.25: DD7.40 45.13,193.33 43.88,192.08 43.88,155.08 51.13,147.83 DD5.43
TA0: length 63.8
  TOP w0.25: DD5.50 48.63,144.33 40.88,152.08 40.88,183.08 38.76,185.21 DD3.19
TA1: length 63.4
  TOP w0.25: DD3.18 39.02,183.94 40.38,182.58 40.38,151.58 48.13,143.83 DD5.51
TA2: length 62.8
  TOP w0.25: DD3.17 38.8,182.67 39.88,181.58 39.88,151.08 47.63,143.33 DD5.52
TA3: length 62.2
  TOP w0.25: DD5.53 47.13,142.83 39.38,150.58 39.38,180.58 38.56,181.4 DD3.16
TADR0: length 53.4
  TOP w0.25: DD5.68 45.63,135.33 34.88,146.08 34.88,166.08 34.17,166.79 DD4.15
TADR1: length 52.5
  TOP w0.25: DD4.14 33.44,165.52 34.38,164.58 34.38,145.58 45.13,134.83 DD5.69
TBL: length 54.9
  TOP w0.25: DD4.17 35.13,169.33 35.88,168.58 35.88,147.08 46.63,136.33 DD5.66
TCK: length 19.9
  TOP w0.25: DD5.35 62.63,154.13 61.82,154.95 61.82,158.54 61.18,159.17 56.1,159.17 55.47,159.81 55.47,161.71 54.83,162.34 52.29,162.34 51.66,161.71 X7.1
TD0: length 115.4
  TOP w0.25: DD1.18 v1(33.24,210.61) ; DD7.85 59.63,174.33 58.88,173.58 58.88,172.08 59.38,171.58 v1(59.88,171.58)
  BOTTOM w0.25: v1(33.24,210.61) 40.22,217.58 74.38,217.58 78.88,213.08 78.88,175.08 75.88,172.08 60.38,172.08 v1(59.88,171.58)
TD1: length 108.8
  TOP w0.25: v1(59.88,173.08) 60.13,173.33 DD7.86 ; DD1.17 v1(34.51,209.34)
  BOTTOM w0.25: v1(59.88,173.08) 60.38,173.58 75.88,173.58 77.38,175.08 77.38,212.58 73.38,216.58 42.88,216.58 36.88,210.58 35.76,210.58 v1(34.51,209.34)
TD2: length 85.9
  TOP w0.25: v1(74.88,179.08) 74.13,179.83 DD7.114 ; DD1.16 v1(33.24,208.07)
  BOTTOM w0.25: v1(33.24,208.07) 33.99,208.07 34.01,208.08 34.88,208.08 36.38,209.58 37.88,209.58 44.38,216.08 71.88,216.08 76.38,211.58 76.38,179.58 75.88,179.08 v1(74.88,179.08)
TD3: length 81.3
  TOP w0.25: v1(74.88,180.58) 74.63,180.33 DD7.115 ; DD1.15 v1(34.51,206.8)
  BOTTOM w0.25: v1(34.51,206.8) 35.8,208.08 38.38,208.08 45.88,215.58 70.38,215.58 74.88,211.08 v1(74.88,180.58)
TD4: length 33.3
  TOP w0.25: v1(49.88,188.08) 50.38,187.58 50.38,185.08 51.13,184.33 DD7.58 ; DD1.14 v1(33.24,205.53)
  BOTTOM w0.25: v1(49.88,188.08) 45.38,192.58 45.38,197.58 37.44,205.53 v1(33.24,205.53)
TD5: length 33.9
  TOP w0.25: 31.54,204.26 v1(34.51,204.26) ; DD7.59 50.63,183.83 49.88,184.58 49.88,186.08 v1(48.38,187.58)
  BOTTOM w0.25: v1(48.38,187.58) 46.38,187.58 44.38,189.58 44.38,197.08 37.38,204.08 35.44,204.08 35.26,204.26 v1(34.51,204.26)
TD6: length 34
  TOP w0.25: v1(48.38,186.08) 49.38,185.08 49.38,184.58 50.63,183.33 DD7.60 ; DD1.12 v1(33.24,202.99)
  BOTTOM w0.25: v1(33.24,202.99) 33.99,202.99 34.09,203.08 36.88,203.08 43.38,196.58 43.38,187.58 44.88,186.08 v1(48.38,186.08)
TD7: length 34.6
  TOP w0.25: DD7.63 50.63,181.83 49.38,183.08 49.38,183.58 v1(48.38,184.58) ; DD1.11 v1(34.51,201.72)
  BOTTOM w0.25: v1(34.51,201.72) 35.26,201.72 35.4,201.58 36.88,201.58 42.38,196.08 42.38,186.08 43.88,184.58 v1(48.38,184.58)
TD8: length 30.9
  TOP w0.25: v1(48.38,183.08) 50.13,181.33 DD7.64 ; DD2.18 v1(33.24,197.27)
  BOTTOM w0.25: v1(48.38,183.08) 43.88,183.08 41.38,185.58 41.38,192.58 36.69,197.27 v1(33.24,197.27)
TD9: length 30.6
  TOP w0.25: DD7.65 49.13,180.83 v1(48.38,181.58) ; DD2.17 v1(34.51,196)
  BOTTOM w0.25: v1(48.38,181.58) 43.88,181.58 40.38,185.08 40.38,192.08 36.38,196.08 35.34,196.08 35.26,196 v1(34.51,196)
TD10: length 30.4
  TOP w0.25: DD2.16 v1(33.24,194.73) ; v1(48.38,180.08) 48.63,180.33 DD7.66
  BOTTOM w0.25: v1(48.38,180.08) 43.88,180.08 39.38,184.58 39.38,191.58 36.38,194.58 34.14,194.58 33.99,194.73 v1(33.24,194.73)
TD11: length 31
  TOP w0.25: v1(48.38,178.58) 49.63,179.83 DD7.67 ; DD2.15 v1(34.51,193.46)
  BOTTOM w0.25: v1(34.51,193.46) 36,193.46 38.38,191.08 38.38,184.08 43.88,178.58 v1(48.38,178.58)
TD12: length 31.5
  TOP w0.25: DD2.14 v1(33.24,192.19) ; v1(48.38,177.08) 50.63,179.33 DD7.68
  BOTTOM w0.25: v1(33.24,192.19) 33.99,192.19 34.1,192.08 35.88,192.08 37.38,190.58 37.38,183.58 43.88,177.08 v1(48.38,177.08)
TD13: length 36.4
  TOP w0.25: DD2.13 v1(34.51,190.92) ; v1(53.88,173.58) 54.76,173.58 55.63,174.45 DD7.77
  BOTTOM w0.25: v1(53.88,173.58) 45.38,173.58 36.38,182.58 36.38,189.05 v1(34.51,190.92)
TD14: length 37.6
  TOP w0.25: v1(54.88,172.58) 56.13,173.83 DD7.78 ; DD2.12 v1(33.24,189.65)
  BOTTOM w0.25: v1(54.88,172.58) 45.38,172.58 35.88,182.08 35.88,188.58 34.88,189.58 34.06,189.58 33.99,189.65 v1(33.24,189.65)
TD15: length 39.2
  TOP w0.25: DD7.79 56.63,172.33 v1(55.88,171.58) ; DD2.11 v1(34.51,188.38)
  BOTTOM w0.25: v1(34.51,188.38) 34.51,181.95 44.88,171.58 v1(55.88,171.58)
TDI: length 8.9
  TOP w0.25: X7.9 61.82,159.81 62.45,159.17 62.45,155.11 63.13,154.43 DD5.34
TDO: length 14.6
  TOP w0.25: DD5.36 62.13,153.83 61.18,154.78 61.18,157.9 60.55,158.54 55.47,158.54 54.2,159.81 X7.3
TMS: length 16.3
  TOP w0.25: X7.5 58.01,162.34 62.45,162.34 63.09,161.71 63.09,155.36 63.63,154.82 DD5.33
TP2: length 9.8
  TOP w0.25: v1(82.38,184.08) 81.13,185.33 DD7.125
TP3: length 9.4
  TOP w0.25: DD7.126 82.13,185.83 v1(82.38,185.58)
TP4: length 9.6
  TOP w0.25: DD7.127 81.63,186.33 v1(82.38,187.08)
TP5: length 8.8
  TOP w0.25: DD7.128 80.13,186.83 v1(81.38,188.08)
TP6: length 8
  TOP w0.25: v1(80.38,189.08) 78.63,187.33 DD7.129
TRDDI10: length 47.1
  TOP w0.25: DD5.75 63.13,128.33 58.38,123.58 28.88,123.58 26.88,121.58 26.88,120.08 28.05,118.91 DD6.3
TRDDI11: length 32.7
  TOP w0.25: DD6.72 58.72,110.91 69.63,121.83 DD5.88
TRDDI12: length 34.5
  TOP w0.25: DD6.71 59.22,110.41 72.13,123.33 DD5.93
TRDDI13: length 35.5
  TOP w0.25: DD6.70 59.72,109.91 72.63,122.83 DD5.94
